# Altium PCB PCB1.PcbDoc
Units mm, origin at the board's own origin, x right, y up, seen from the top; angles counter-clockwise.
Board outline 49.02 x 49 mm, 2 copper layers (Top Layer, Bottom Layer); 50 components, 41 nets, 213 pads, 48 vias.
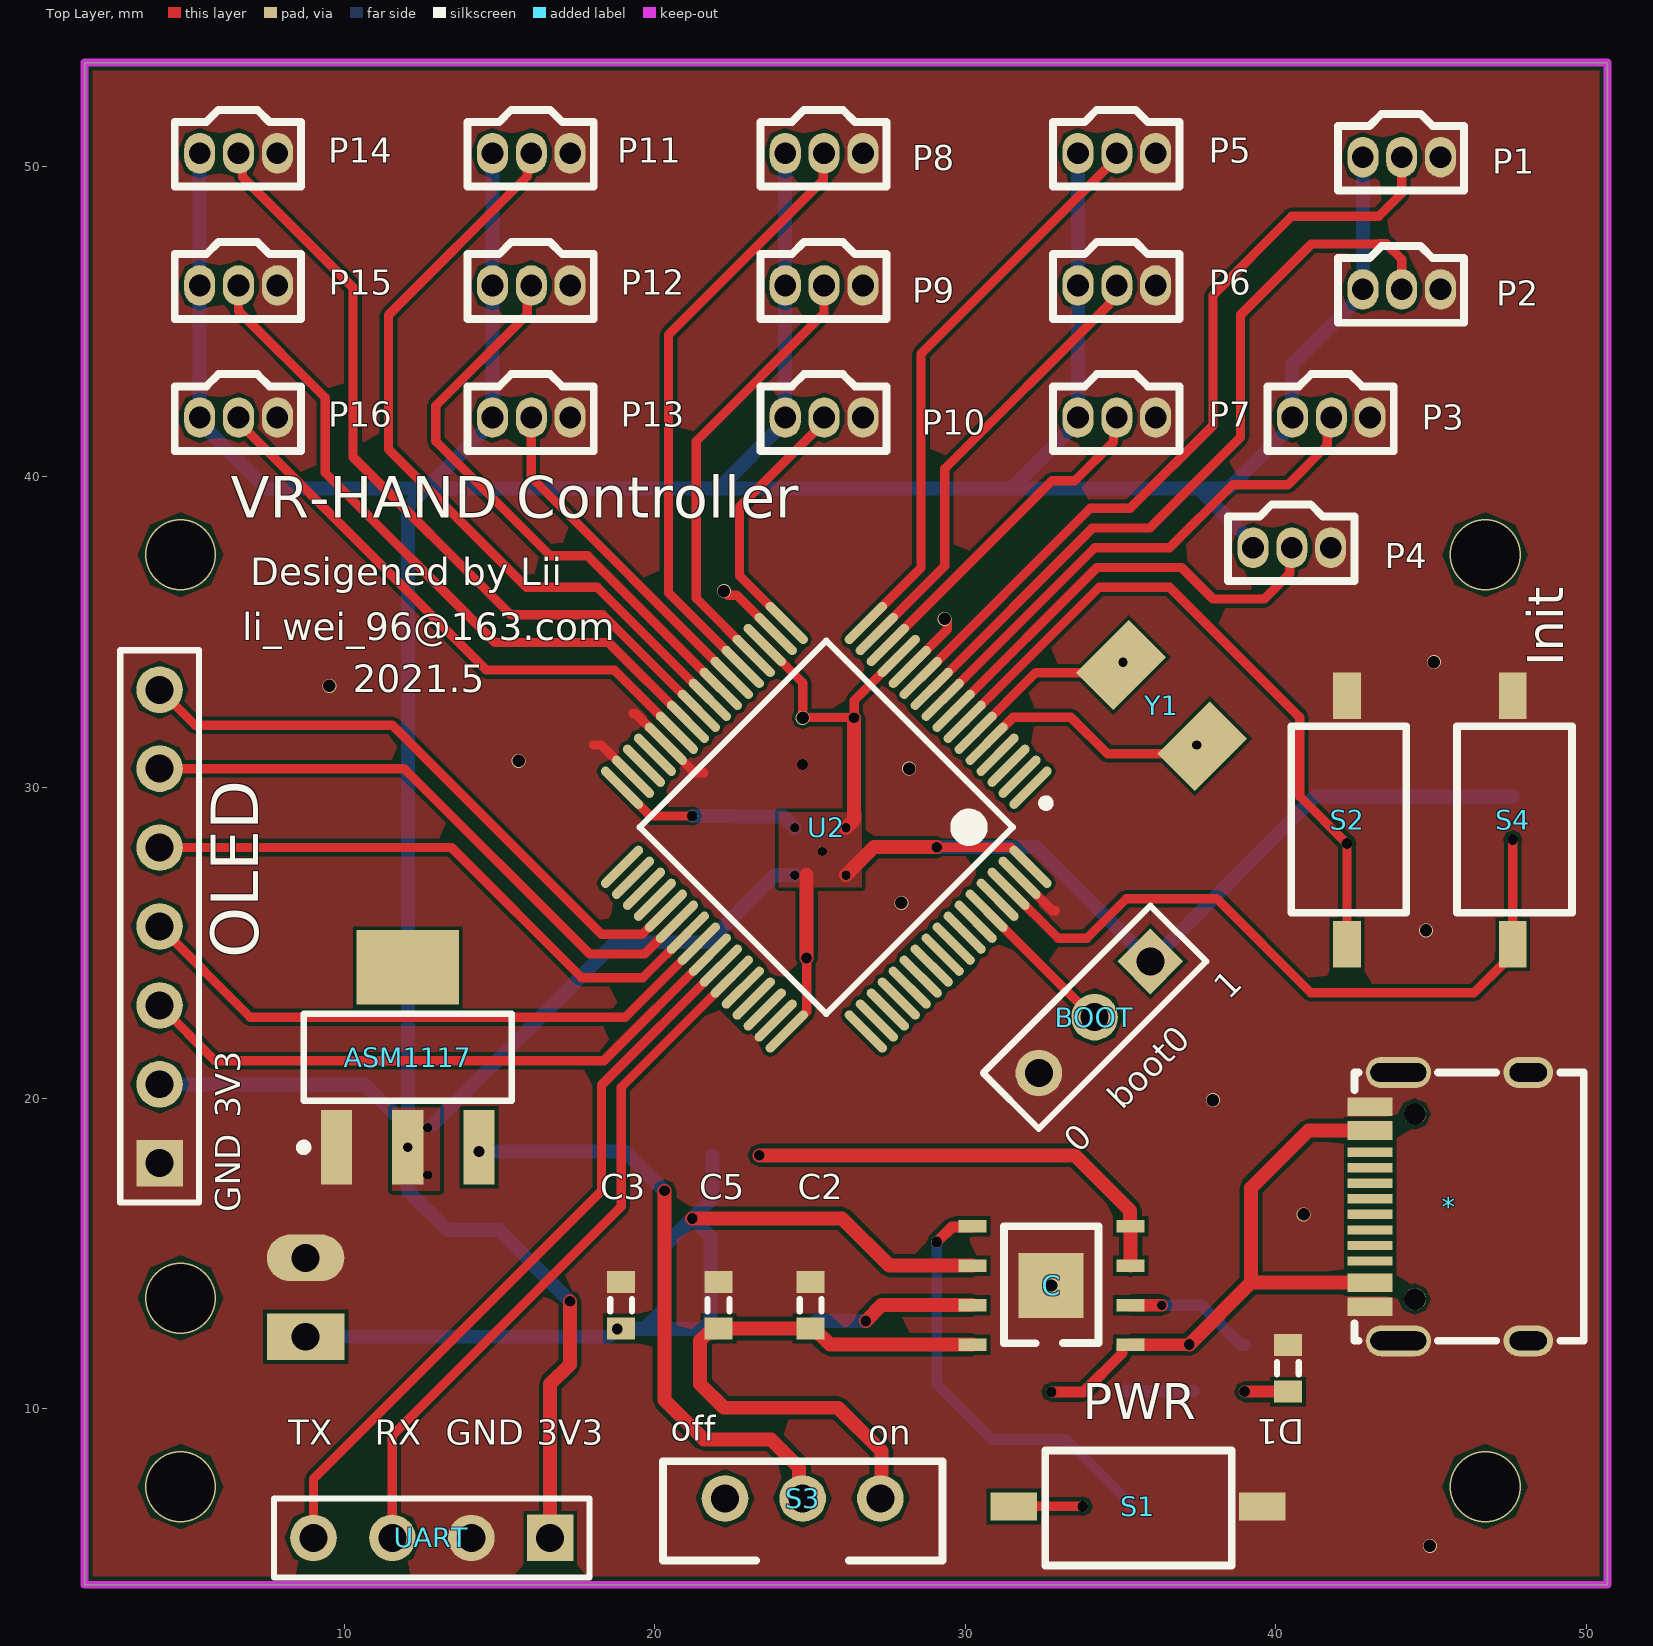
[diagram p0: Top Layer view]
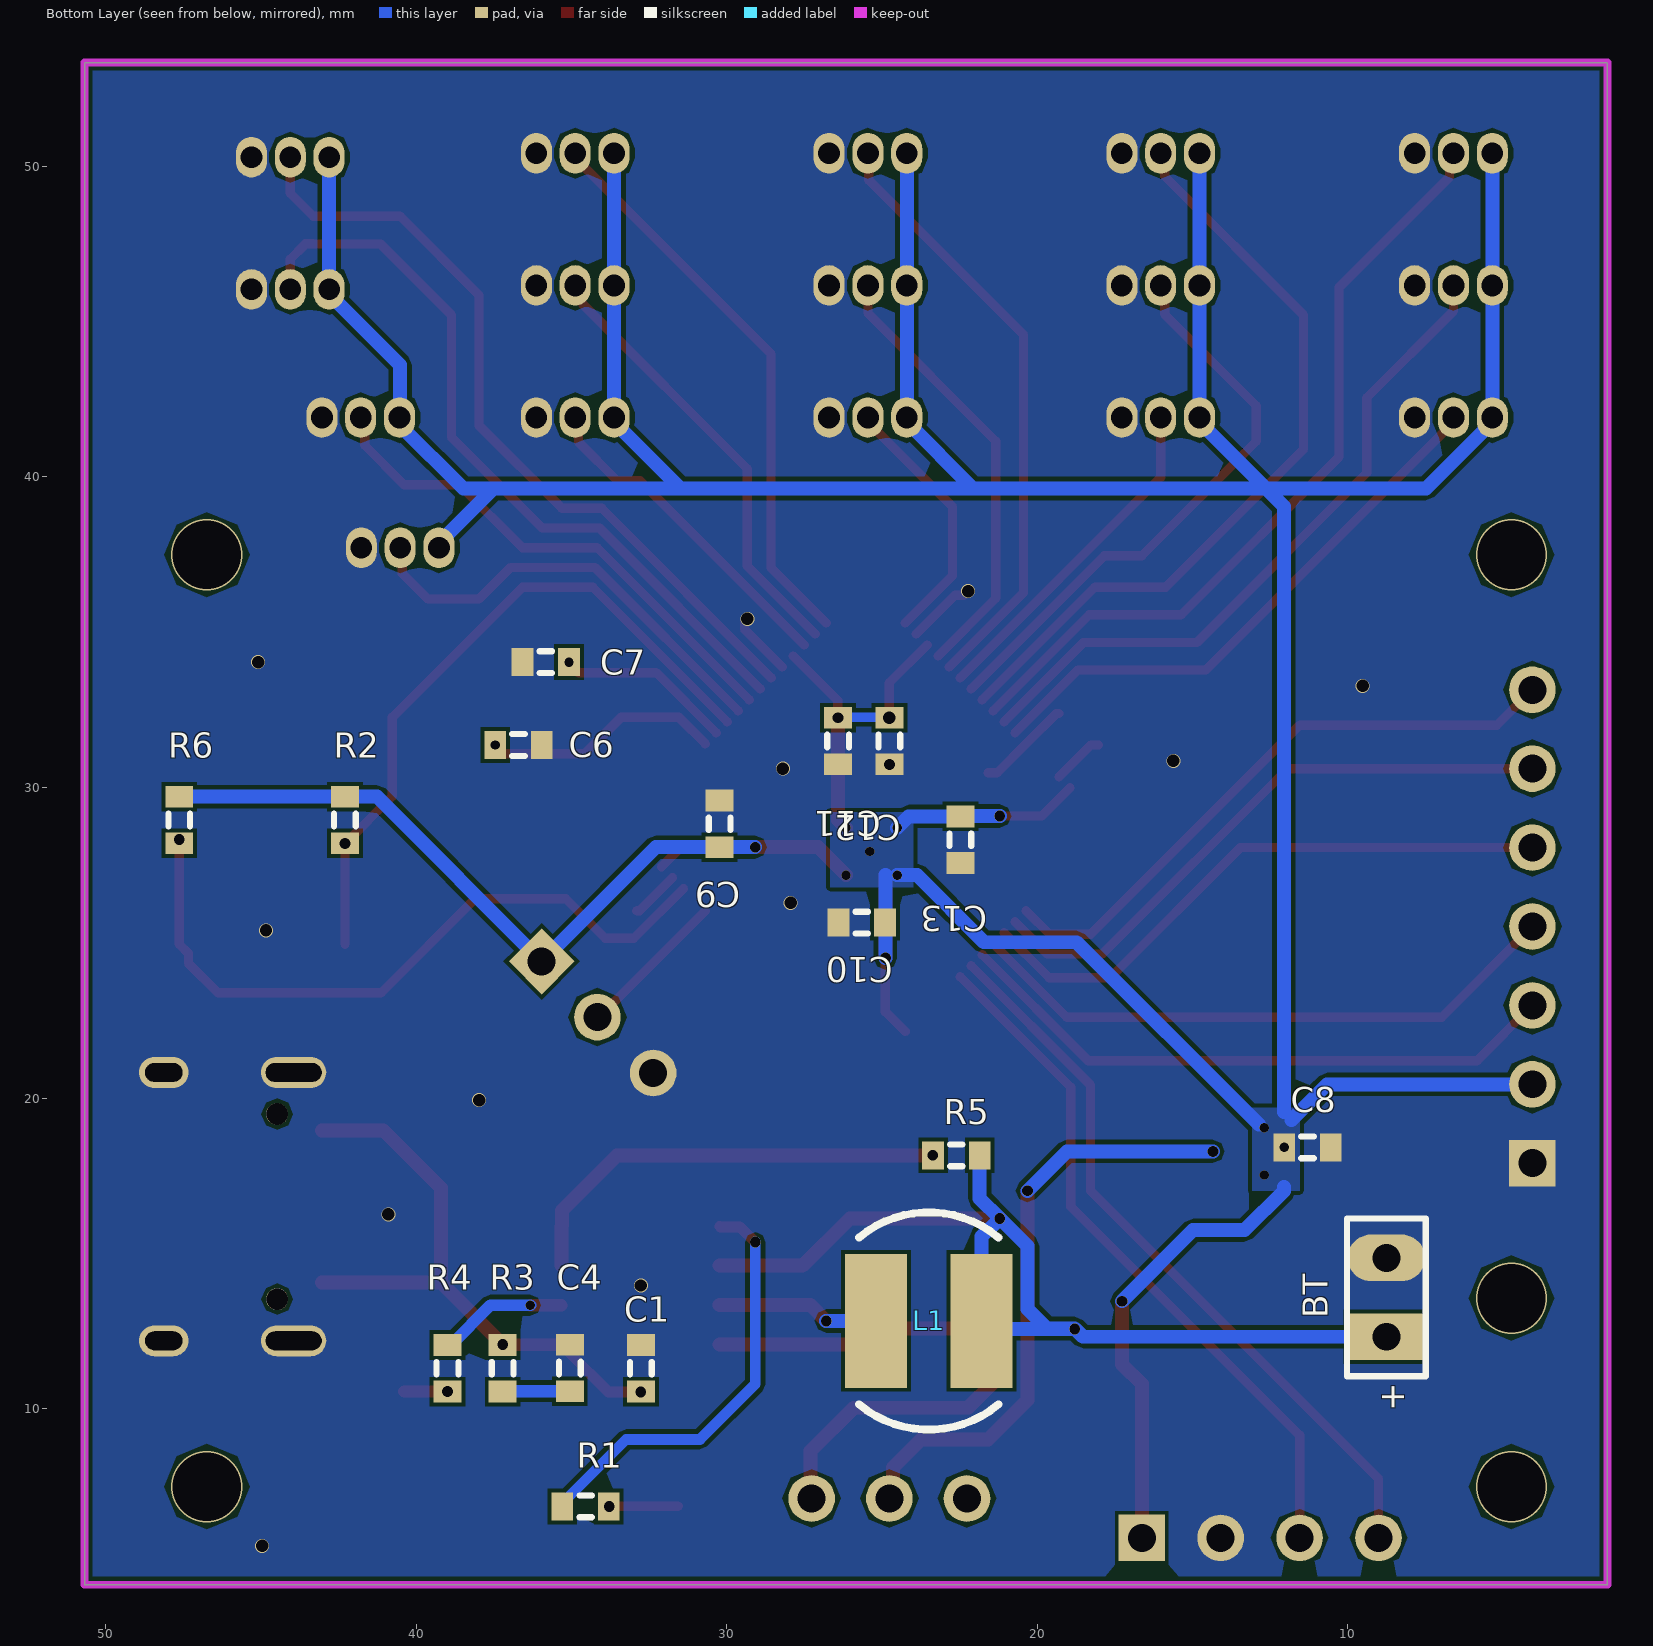
[diagram p1: Bottom Layer view, seen from below]
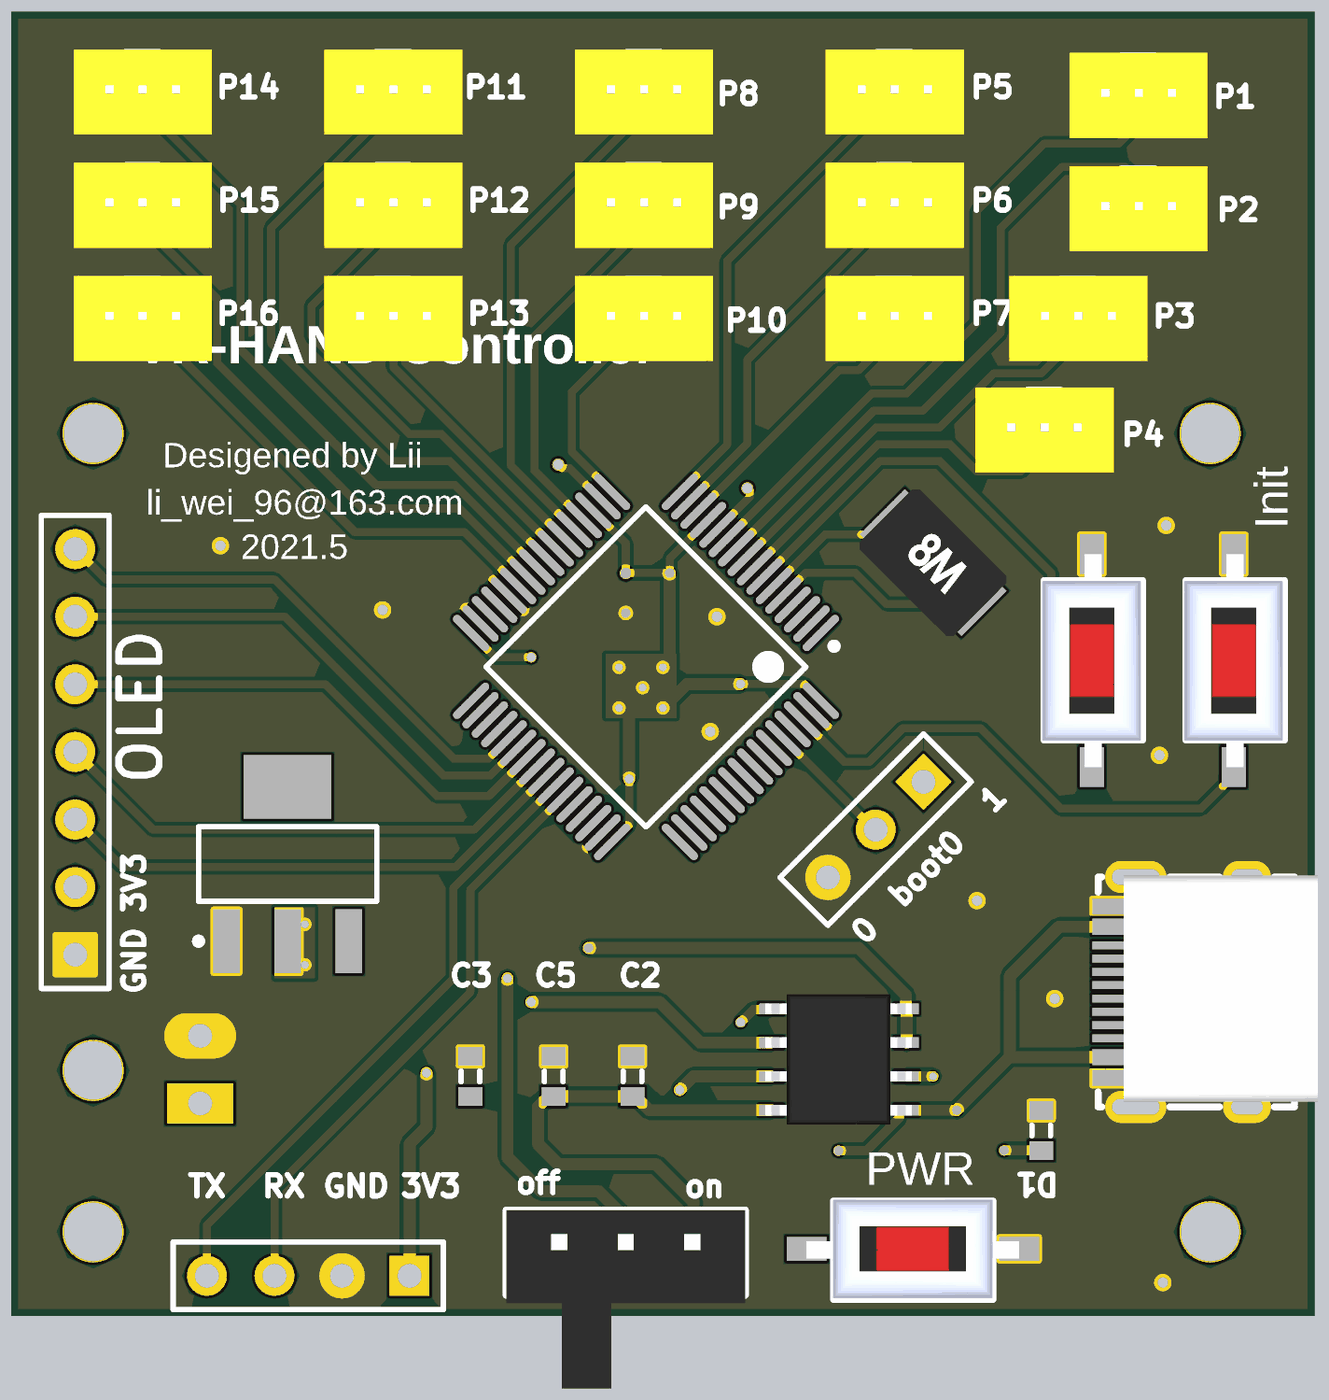
[diagram p2: 3D render of the assembled board from above, using the file's embedded part models]

## Layer stack, top to bottom
Top Solder: solder mask 0.0102, Solder Resist, Dk 3.5
Top Layer: signal copper 0.0356
Dielectric 1: dielectric 0.32, FR-4, Dk 4.8
Bottom Layer: signal copper 0.0356
Bottom Solder: solder mask 0.0102, Solder Resist, Dk 3.5

## Board outline
1.649,4.337 1.649,53.337 50.671,53.337 50.671,4.337

## Design rules (kind name [scope] priority, off if disabled: settings)
Clearance [All] p1: gap=0.12 ignorepadtopadclearanceinfootprint=TRUE
DiffPairsRouting [All] p1: maxlimit=0.6 minlimit=0.3 mostfreqgap=0.5 toplayer_minwidth=0.3 toplayer_maxwidth=0.6 toplayer_prefwidth=0.5 bottomlayer_minwidth=0.3 bottomlayer_maxwidth=0.6 bottomlayer_prefwidth=0.5 maxuncoupledlength=15
HoleSize [All] p1: absolutevalues=TRUE maxlimit=10 minlimit=0.3 maxpercent=80.000 minpercent=20.000
PlaneClearance [All] p1: clearance=0.2
PlaneConnect [All] p1: planeconnectstyle=Direct reliefexpansion=0.5 reliefentries=4 reliefconductorwidth=0.5 reliefairgap=0.15
PolygonConnect [All] p1: connectstyle=Direct reliefconductorwidth=0.5 reliefentries=4 polygonreliefangle="90 Angle" airgapwidth=0
RoomDefinition Sheet1 [InComponentClass('Sheet1')] p1: confinementstyle=ConfineOut formatcopy=TRUE lockcomponents=FALSE outline 81.396,56.437 81.396,63.611 81.257,63.881 75.3,63.881 75.3,56.388
RoutingCorners [All] p1: cornerstyle=45-Degree minsetback=0 maxsetback=5
RoutingVias [All] p1: holewidth=0.3 width=1.27 viastyle="Through Hole" minholewidth=0.3 minwidth=0.3 maxholewidth=5 maxwidth=10
SilkToSilkClearance [All] p1: silktosilkclearance=0
SilkToSolderMaskClearance [IsPad] p1: minsilkscreentomaskgap=0.1 clearancetoexposedcopper=TRUE
SolderMaskExpansion [All] p1: expansion=0.102 istentingtop=FALSE soldermaskfromhole=TRUE
Width [All] p1: maxlimit=10 minlimit=0.3 preferedwidth=0.3
23 further rules are at their usual default settings.

## Components (designator, comment, footprint, x,y, rotation, side; value= is the part's Value field where it differs from the comment)
* "USB_Type_C" USB_Type_C 46.482,16.637 r90 top
ASM1117 "ASM1117_3.3V" SOT223_N 12.051,21.315 r90 top
BOOT "Header 3" HDR1X3 35.959,24.402 r225 top
BT "Battery" BAT-2 8.763,13.589 r90 bottom
C "IP5305" SOP8_1 32.766,13.97 r180 top
C1 "Cap Pol3" J1-0603 32.766,11.303 r90 bottom value=10uf
C2 "Cap Pol3" J1-0603 25.019,13.335 r90 top value=10uf
C3 "Cap Pol3" J1-0603 18.923,13.335 r90 top value=10uf
C4 "Cap Pol3" J1-0603 35.052,11.315 r90 bottom value=10uf
C5 "Cap Pol3" J1-0603 22.056,13.335 r90 top value=22uf
C6 "Cap Pol3" J1-0603 36.703,31.369 r180 bottom value=22pF
C7 "Cap Pol3" J1-0603 35.826,34.036 r0 bottom value=22pF
C8 "Cap Pol3" J1-0603 11.303,18.415 r180 bottom value=22uF
C9 "Cap Pol3" J1-0603 30.226,28.829 r270 bottom value=10uf
C10 "Cap Pol3" J1-0603 25.654,25.654 r180 bottom value=0.1uf
C11 "Cap Pol3" J1-0603 26.416,31.496 r90 bottom value=0.1uf
C12 "Cap Pol3" J1-0603 24.765,31.496 r90 bottom value=0.1uf
C13 "Cap Pol3" J1-0603 22.479,28.321 r90 bottom value=0.1uf
D1 "LED2" J1-0603 40.386,11.303 r90 top
L1 "Inductor" CD43 23.495,12.827 r90 bottom value=2.2uH
OLED "MHDR1X7" HDR1X7 4.064,17.907 r90 top
P1 "SH1.0_3P" SH1_3P_2 44.049,50.292 r270 top
P2 "SH1.0_3P" SH1_3P_2 44.049,46.038 r270 top
P3 "SH1.0_3P" SH1_3P_2 41.783,41.91 r270 top
P4 "SH1.0_3P" SH1_3P_2 40.513,37.719 r270 top
P5 "SH1.0_3P" SH1_3P_2 34.878,50.419 r270 top
P6 "SH1.0_3P" SH1_3P_2 34.878,46.164 r270 top
P7 "SH1.0_3P" SH1_3P_2 34.878,41.91 r270 top
P8 "SH1.0_3P" SH1_3P_2 25.453,50.419 r270 top
P9 "SH1.0_3P" SH1_3P_2 25.453,46.164 r270 top
P10 "SH1.0_3P" SH1_3P_2 25.453,41.91 r270 top
P11 "SH1.0_3P" SH1_3P_2 16.029,50.419 r270 top
P12 "SH1.0_3P" SH1_3P_2 16.029,46.164 r270 top
P13 "SH1.0_3P" SH1_3P_2 16.029,41.91 r270 top
P14 "SH1.0_3P" SH1_3P_2 6.604,50.419 r270 top
P15 "SH1.0_3P" SH1_3P_2 6.604,46.164 r270 top
P16 "SH1.0_3P" SH1_3P_2 6.604,41.91 r270 top
R1 "Res3" J1-0603 34.544,6.858 r0 bottom value=10k
R2 "Res3" J1-0603 42.291,28.956 r90 bottom value=10K
R3 "Res3" J1-0603 37.211,11.303 r90 bottom value=2R
R4 "Res3" J1-0603 38.989,11.303 r270 bottom value=300R
R5 "Res3" J1-0603 22.606,18.161 r180 bottom value=1K
R6 "Res3" J1-0603 47.625,28.956 r90 bottom value=10K
S1 "SW-PB" SW_DP_1 35.56,6.858 r0 top
S2 "SW-PB" SW_DP_1 42.291,28.956 r90 top
S3 "SW-SPST" SW_s1 24.765,7.112 r0 top
S4 "SW-PB" SW_DP_1 47.625,28.956 r90 top
U2 "STM32F103RCT6" STM-LQFP64_N 25.525,28.721 r225 top
UART "Header 4" HDR1X4 16.637,5.842 r180 top
Y1 "8M" YXC_8M 36.322,32.639 r315 top

## Footprints (in the part's own frame and the unit in brackets; to place one, negate y for a bottom-side part, rotate by r counter-clockwise, add the part's x,y. Pads: shape width x height; smd on the part's side, far side on the other; paste and mask are expansions set on the pad)
BAT-2 [mm] "Battery; 2 Leads"
  rect 1.5x2.5 hole 0.9: 1(-1.27,0)
  oval 1.5x2.5 hole 0.9: 2(1.27,0)
  silkscreen extent -2.54,-1.27 2.54,1.27
CD43 [mm]
  rect 4.3x2 smd: 1(0,1.7) 2(0,-1.7)
  silkscreen extent -3.5,-2.25 3.5,2.25, body extent -2,-2.2 2,2.2, height 3.2
HDR1X3 [mm] "Connector; Header; 3 Position"
  rect 1.5x1.5 hole 0.9: 1(0,0)
  round 1.5 hole 0.9: 2(2.54,0) 3(5.08,0)
  silkscreen extent -1.27,-1.27 6.35,1.27
HDR1X4 [mm] "Connector; Header; 4 Position"
  rect 1.5x1.5 hole 0.9: 1(0,0)
  round 1.5 hole 0.9: 2(2.54,0) 3(5.08,0) 4(7.62,0)
  silkscreen extent -1.27,-1.27 8.89,1.27
HDR1X7 [mm] "Connector; Header; 7 Position"
  rect 1.5x1.5 hole 0.9: 1(0,0)
  round 1.5 hole 0.9: 2(2.54,0) 3(5.08,0) 4(7.62,0) 5(10.16,0) 6(12.7,0) 7(15.24,0)
  silkscreen extent -1.27,-1.27 16.51,1.27
J1-0603 [mm] "Chip Resistor, Body 1.6x0.8mm, IPC High Density"
  rect 0.7x0.9 smd: 1(-0.75,0) 2(0.75,0)
  silkscreen extent -0.2,-0.35 0.2,0.35, body extent -0.85,-0.48 0.85,0.48, height 0.9
SH1_3P_2 [mm]
  oval 1.3x1 hole 0.7: 1(0,1.25) 2(0,0) 3(0,-1.25)
  silkscreen extent -1.4,-2.05 1.07,2.01, body extent -1.5,-2.6 1.7,2.6, height 4.7
SOP8_1 [mm]
  rect 0.9x0.4 smd: 1(-2.56,1.905) 2(-2.56,0.635) 3(-2.56,-0.635) 4(-2.56,-1.905) 5(2.54,-1.905) 5(2.54,-1.905) 6(2.54,-0.635) 7(2.54,0.635) 8(2.54,1.905)
  rect 2.09x2.09 smd: 9(0,0)
  silkscreen extent -1.52,-1.91 1.52,1.86, body extent -2.75,-2.45 2.75,2.45, height 1.75
SOT223_N [mm] "SOT223, 4-Leads, Body 6.5x3.5mm, Pitch 2.3mm, Lead Span 7mm, IPC Medium Density"
  rect 2.4x1 smd: 1(-2.9,2.3) 2(-2.9,0) 3(-2.9,-2.3)
  rect 2.4x3.3 smd: 4(2.9,0)
  silkscreen extent -3.02,-3.35 1.4,3.47, body extent -1.85,-3.35 1.85,3.35, height 1.7
STM-LQFP64_N [mm] "Thin QFP, 64-Leads, Body 10x10mm, Pitch 0.5mm, IPC Medium Density"
  oval 1.8x0.3 smd: 1(-5.55,3.75) 2(-5.55,3.25) 3(-5.55,2.75) 4(-5.55,2.25) 5(-5.55,1.75) 6(-5.55,1.25) 7(-5.55,0.75) 8(-5.55,0.25) 9(-5.55,-0.25) 10(-5.55,-0.75) 11(-5.55,-1.25) 12(-5.55,-1.75) 13(-5.55,-2.25) 14(-5.55,-2.75) 15(-5.55,-3.25) 16(-5.55,-3.75) 33(5.55,-3.75) 34(5.55,-3.25) 35(5.55,-2.75) 36(5.55,-2.25) 37(5.55,-1.75) 38(5.55,-1.25) 39(5.55,-0.75) 40(5.55,-0.25) 41(5.55,0.25) 42(5.55,0.75) 43(5.55,1.25) 44(5.55,1.75) 45(5.55,2.25) 46(5.55,2.75) 47(5.55,3.25) 48(5.55,3.75)
  oval 0.3x1.8 smd: 17(-3.75,-5.55) 18(-3.25,-5.55) 19(-2.75,-5.55) 20(-2.25,-5.55) 21(-1.75,-5.55) 22(-1.25,-5.55) 23(-0.75,-5.55) 24(-0.25,-5.55) 25(0.25,-5.55) 26(0.75,-5.55) 27(1.25,-5.55) 28(1.75,-5.55) 29(2.25,-5.55) 30(2.75,-5.55) 31(3.25,-5.55) 32(3.75,-5.55) 49(3.75,5.55) 50(3.25,5.55) 51(2.75,5.55) 52(2.25,5.55) 53(1.75,5.55) 54(1.25,5.55) 55(0.75,5.55) 56(0.25,5.55) 57(-0.25,5.55) 58(-0.75,5.55) 59(-1.25,5.55) 60(-1.75,5.55) 61(-2.25,5.55) 62(-2.75,5.55) 63(-3.25,5.55) 64(-3.75,5.55)
  silkscreen extent -5.67,-4.25 4.25,4.57, body extent -5,-5 5,5, height 1.6
SW_DP_1 [mm]
  rect 1.5x0.9 smd: 1(-4,0) 2(4,0)
  silkscreen extent -2.98,-1.91 3.02,1.8, body extent -4,-1.85 4,1.85, height 2.5
SW_s1 [mm]
  round 1.5 hole 0.9: 1(2.5,0) 2(0,0) 3(-2.5,0)
  silkscreen extent -4.5,-2 4.5,1.2, body extent -4.5,-5.5 4.5,1.2, height 4.55
USB_Type_C [mm]
  rect 0.6x1.45 smd: 1(-3.354,3.455) 2(-2.579,3.455) 11(2.321,3.455) 12(3.091,3.455)
  rect 0.3x1.45 smd: 3(-1.379,3.454) 4(-0.379,3.455) 5(0.121,3.455) 6(1.121,3.455) 7(-1.879,3.455) 8(-0.879,3.455) 9(0.621,3.455) 10(1.621,3.455)
  oval 1x2.1 hole 0.6 slot 1.8 at 90 deg: 13(-4.449,2.54) 14(4.191,2.54)
  oval 1x1.6 hole 0.6 slot 1.2 at 90 deg: 15(-4.449,-1.64) 16(4.191,-1.64)
  round 0.7 hole 0.7 unplated: ""(-3.109,2.01) ""(2.851,2.01)
  silkscreen extent -4.45,-3.43 4.19,3.96, body extent -4.25,-5.46 4.83,3, height 22.6
YXC_8M [mm]
  rect 1.7x2.4 smd: 1(-1.85,0) 2(1.85,0)
  body extent -2.5,-1.6 2.5,1.6, height 1.2

## Part data
BOOT: "Header, 3-Pin", LatestRevisionDate=17-Jul-2002, LatestRevisionNote="Re-released for DXP Platform.", Publisher="Altium Limited"
BT: "Multicell Battery", LatestRevisionDate=17-Jul-2002, LatestRevisionNote="Re-released for DXP Platform.", PackageDescription="Battery; 2 Leads", PackageReference=BAT-2, Published=24-Mar-1999, Publisher="Altium Limited"
C1 C2 C3 C4 C5 C6 C7 C8 C9 C10 C11 C12 C13: "Polarized Capacitor (Surface Mount)", LatestRevisionDate=29-May-2009, LatestRevisionNote="IPC-7351 Footprint Added.", PackageDescription="Chip Capacitor", PackageReference=C0805, Published=8-Jun-2000, Publisher="Altium Limited"
D1: "Typical RED, GREEN, YELLOW, AMBER GaAs LED", LatestRevisionDate=17-Jul-2002, LatestRevisionNote="Re-released for DXP Platform.", PackageDescription="SM LED; 2 Flat Leads", PackageReference=3.2X1.6X1.1, PackageVersion=Feb-2002, Published=8-Jun-2000, Publisher="Altium Limited"
OLED: "Header, 7-Pin", LatestRevisionDate=17-Jul-2002, LatestRevisionNote="Re-released for DXP Platform.", Publisher="Altium Limited"
R1 R2 R3 R4 R5 R6: "Resistor", LatestRevisionDate=29-May-2009, LatestRevisionNote="IPC-7351 Footprint Added.", PackageDescription="Chip Resistor", PackageReference=J1-0603, Published=8-Jun-2000, Publisher="Altium Limited"
S1 S2 S4: "Switch", LatestRevisionDate=17-Jul-2002, LatestRevisionNote="Re-released for DXP Platform.", PackageDescription="Switch; 2 Leads", PackageReference=SPST-2, Published=24-Mar-1999, Publisher="Altium Limited"
S3: "Single-Pole, Single-Throw Switch", LatestRevisionDate=17-Jul-2002, LatestRevisionNote="Re-released for DXP Platform.", PackageDescription="Switch; 2 Leads", PackageReference=SPST-2, Published=24-Mar-1999, Publisher="Altium Limited"
U2: "ARM Cortex-M3 32-bit MCU, 256 KB Flash, 48 KB Internal RAM, 51 I/Os, 64-pin LQFP, -40 to 85 degC, Tray", I/Os (High Current)=51, Operating Frequency(F) (Processor speed) (MHz)=72, Supplier Part Number 1=497-9033-ND, Supply Voltage(Vcc) min (V)=2, A/D Converter="3x12-bit (16 Channel)", ComponentLink1Description="Manufacturer URL", ComponentLink1URL=http://www.st.com/web/en/home.html, ComponentLink2Description=Datasheet, ComponentLink2URL=http://www.st.com/st-web-ui/static/active/en/resource/technical/document/datasheet/CD00191185.pdf, ComponentLink3Description="Package Specification", ComponentLink3URL=http://www.st.com/st-web-ui/static/active/en/resource/technical/document/datasheet/DM00037051.pdf, Core="ARM Cortex-M3", D/A Converter="2x12-bit (2 Channel)", DatasheetVersion="Rev. 8", FLASH Size (Prog) (kB)=256, Internal RAM Size (kB)=48, Mounting Technology="Surface Mount", PackageDescription="64-Pin Low Profile Quad Flat Package, 10 x 10 mm Body, 0.5 mm Pitch", PackageReference=LQFP64, PackageVersion="Rev. 4, 06/2013", Packing=Tray, PartNumber=STM32F103RCT6, Supplier 1=Digi-Key, Supplier 2=Newark, Supplier 3=Newark, Supplier 4=Mouser, Supplier Part Number 2=01P4099, Supplier Part Number 3=57P1227, Supplier Part Number 4=511-STM32F103RCT6
UART: "Header, 4-Pin", LatestRevisionDate=17-Jul-2002, LatestRevisionNote="Re-released for DXP Platform.", Publisher="Altium Limited"
Y1: library part XTAL, "Crystal Oscillator", LatestRevisionDate=17-Jul-2002, LatestRevisionNote="Re-released for DXP Platform.", PackageDescription="Crystal, Thru-Hole; 2 Leads; Body 3.1 x 8.2 mm (Dia.xH)", PackageReference=R38, Published=8-Jun-2000, Publisher="Altium Limited"
L1: Code_IEC=1005, Code_JEITA=0402, LatestRevisionDate=29-May-2009, LatestRevisionNote="IPC-7351 Footprint Added.", PackageDescription="Chip Inductor", PackageReference=0402-A, Published=8-Jun-2000, Publisher="Altium Limited"

## Via types
v1: diameter 0.35, hole 0.35, Top Layer to Bottom Layer, 19 vias
v2: diameter 0.45, hole 0.4, Top Layer to Bottom Layer, 13 vias
v3: diameter 0.3, hole 0.3, Top Layer to Bottom Layer, 11 vias
v4: diameter 2.3, hole 2.2, Top Layer to Bottom Layer, 5 vias

## Nets (pads, with @x,y where several pads share a name; then routed paths per layer and width w, separated by ;. In a path a pad name is that pad's centre, name@x,y a point inside that pad or via, vN(x,y) a via of type N, cw(c..) or ccw(c..) an arc to the next point about the centre after c; other vN are vias at no path point)
3.7V: ASM1117.3 S3.2 | length 19.5
  Top Layer w0.45: v1(20.32,17.018) 20.32,10.287 21.59,9.017 23.749,9.017 24.652,8.114 24.652,7.225 S3.2
  Bottom Layer w0.45: v1(14.351,18.288) 19.05,18.288 v1(20.32,17.018)
3V3: ASM1117.2 BOOT.1 C8.1 C9.2 C10.2 C11.2 C12.2 C13.2 OLED.2 P1.3 P2.3 P3.3 P4.3 P5.3 P6.3 P7.3 P8.3 P9.3 P10.3 P11.3 P12.3 P13.3 P14.3 P15.3 P16.3 R2.2 R6.2 U2.13 U2.19 U2.32 U2.48 U2.64 UART.1 | length 206.3
  Top Layer w0.3: U2.32 19.86,29.083 v1(21.209,29.083) ; U2.19 24.765,33.37 24.765,32.258 24.771,32.252 26.41,32.252 v1(26.416,32.246) 26.426,32.256 26.426,32.803 U2.13 ; U2.48 24.892,22.785 v1(24.892,24.511) ; v1(29.083,28.079) 31.47,28.079 U2.64
  Top Layer w0.45: UART.1 16.637,10.795 17.272,11.43 v1(17.272,13.462) ; v1(24.892,24.511) 24.892,27.178 ; v3(26.162,27.178) 27.063,28.079 v1(29.083,28.079) ; v3(26.162,28.702) 26.416,28.956 v1(26.416,32.246)
  Bottom Layer w0.3: C12.2@24.765,32.258 C11.2@26.404,32.258 ; C11.2@26.404,32.131 C11.2@26.416,32.119
  Bottom Layer w0.45: OLED.2 10.668,20.447 11.811,19.304 ; P14.3 P15.3 P16.3 5.354,41.76 7.49,39.624 12.643,39.624 ; 12.065,17.145 12.065,17.018 13.335,15.748 14.986,15.748 v1(17.272,13.462) ; 12.065,19.558 12.065,39.046 12.643,39.624 ; 12.859,19.145 18.732,25.019 21.717,25.019 23.876,27.178 v3(24.511,27.178) ; P11.3 P12.3 P13.3 14.779,41.76 12.643,39.624 ; v1(21.209,29.083) 22.467,29.083 C13.2 24.142,29.071 v3(24.511,28.702) ; P8.3 P9.3 P10.3 24.203,41.76 22.067,39.624 ; v1(24.892,24.511) 24.892,27.178 ; v1(29.083,28.079) 32.282,28.079 BOOT.1 41.263,29.706 R2.2 R6.2 ; P5.3 P6.3 P7.3 33.628,41.76 31.492,39.624 ; P4.3 39.263,37.869 37.508,39.624 ; P1.3 P2.3 42.799,45.888 40.513,43.602 40.513,41.93 P3.3 40.533,41.676 38.481,39.624 37.508,39.624 ; 12.643,39.624 22.067,39.624 ; 22.067,39.624 31.492,39.624 ; 31.492,39.624 37.508,39.624
  other v2: 24.765,32.246
  other v3: 12.7,17.526 12.051,18.415 12.7,19.05 25.4,27.94
5V: *.2 *.11 C1.1 C.1 R3.2 | length 19.5
  Top Layer w0.35: v1(32.766,10.541) 33.802,10.541 35.051,11.79 35.051,12.04 35.076,12.065 C.1
  Top Layer w0.4: C.1 v1(37.211,12.065)
  Top Layer w0.45: v1(37.211,12.065) 39.204,14.058 ; *.2 39.204,14.058 ; *.11 41.056,18.958 39.204,17.106 39.204,14.058
BAT: BT.1 C3.1 C.6 L1.2 R5.2 | length 33.8
  Top Layer w0.45: v1(21.209,16.129) 26.035,16.129 27.559,14.605 C.6
  Bottom Layer w0.45: BT.1 18.53,12.319 18.796,12.585 19.697,12.585 20.32,13.208 20.32,15.24 v1(21.209,16.129) ; v1(18.796,12.573) 19.697,12.573 21.541,12.573 L1.2 21.795,15.543 v1(21.209,16.129) ; R5.2 21.856,16.776 v1(21.209,16.129)
BLK: OLED.7 U2.37 | length 19.9
  Top Layer w0.3: OLED.7 5.207,32.004 11.557,32.004 18.288,25.273 19.602,25.273 U2.37
BOOT0: BOOT.2 U2.60 | length 4.9
  Top Layer w0.3: U2.60 BOOT.2@34.139,22.582
DC: OLED.6 U2.38 | length 19.6
  Top Layer w0.3: OLED.6 11.938,30.607 17.907,24.638 19.674,24.638 U2.38
E_init: R6.1 S4.1 U2.62 | length 22.9
  Top Layer w0.3: U2.62 32.989,25.146 33.909,25.146 35.179,26.416 38.1,26.416 41.125,23.391 46.378,23.391 47.325,24.338 47.325,24.656 S4.1 v1(47.625,28.321)
GND: *.1 *.12 *.13 *.14 *.15 *.16 ASM1117.1 BOOT.3 BT.2 C1.2 C2.2 C3.2 C4.2 C5.2 C6.2 C7.2 C8.2 C9.1 C10.1 C11.1 C12.1 C13.1 C.9 D1.2 OLED.1 P1.1 P2.1 P3.1 P4.1 P5.1 P6.1 P7.1 P8.1 P9.1 P10.1 P11.1 P12.1 P13.1 P14.1 P15.1 P16.1 S1.2 S2.2 S4.2 U2.12 U2.18 U2.28 U2.31 U2.47 U2.63 UART.2 | length 10.7
  Top Layer w0.3: 18.034,31.369 18.281,31.369 U2.31 ; 19.304,32.385 19.386,32.385 U2.28 21.291,30.48 21.59,30.48 ; v2(22.225,36.322) 22.352,36.195 22.647,36.195 U2.18 ; U2.12 29.425,35.096 29.425,35.345 v2(29.337,35.433) ; U2.63 32.807,26.035 32.893,26.035
  other v1: 24.765,30.746
  other v2: 44.958,5.588 32.766,13.97 40.894,16.256 37.973,19.939 44.831,25.4 27.94,26.289 28.194,30.607 15.621,30.861 9.525,33.274 45.085,34.036
IN1: P4.2 U2.8 | length 14.3
  Top Layer w0.3: U2.8 34.242,37.084 36.957,37.084 37.973,36.068 39.624,36.068 40.447,36.891 40.447,37.653 P4.2
IN2: P3.2 U2.9 | length 16.7
  Top Layer w0.3: U2.9 34.17,37.719 36.576,37.719 38.608,39.751 40.386,39.751 41.656,41.021 41.656,41.783 P3.2
IN3: P2.2 U2.10 | length 24.5
  Top Layer w0.3: U2.10 34.097,38.354 35.941,38.354 38.862,41.275 38.862,45.212 41.148,47.498 43.307,47.498 43.31,47.501 43.558,47.501 44.049,47.01 P2.2
IN4: P1.2 U2.11 | length 25.6
  Top Layer w0.3: U2.11 34.025,38.989 35.306,38.989 37.973,41.656 37.973,45.847 40.513,48.387 43.307,48.387 44.049,49.129 P1.2
IN5: P7.2 U2.14 | length 10.8
  Top Layer w0.3: U2.14 32.793,39.878 33.528,39.878 34.772,41.122 34.772,41.804 P7.2
IN6: P6.2 U2.15 | length 14.4
  Top Layer w0.3: U2.15 29.337,37.129 29.337,40.259 34.614,45.536 34.614,45.56 34.878,45.825 P6.2
IN7: P5.2 U2.16 | length 18.5
  Top Layer w0.3: U2.16 28.575,37.074 28.575,43.966 34.878,50.269 P5.2
IN8: P10.2 U2.17 | length 8.4
  Top Layer w0.3: U2.17 22.733,36.816 22.733,39.04 25.453,41.76 P10.2
IN9: P9.2 U2.20 | length 14.4
  Top Layer w0.3: U2.20 21.336,36.092 21.336,41.148 25.453,45.265 P9.2
IN10: P8.2 U2.21 | length 19.6
  Top Layer w0.3: U2.21 20.447,36.274 20.447,44.577 25.424,49.554 25.424,50.39 P8.2
IN11: P13.2 U2.22 | length 11.1
  Top Layer w0.3: P13.2 16.029,39.985 U2.22
IN12: P12.2 U2.23 | length 18.8
  Top Layer w0.3: P12.2 15.895,46.031 15.895,45.232 12.954,42.291 12.954,41.148 16.637,37.465 17.842,37.465 U2.23
IN13: P11.2 U2.24 | length 25.1
  Top Layer w0.3: P11.2 15.895,50.285 15.895,49.677 11.43,45.212 11.43,40.894 15.875,36.449 18.15,36.449 U2.24
IN14: P14.2 U2.25 | length 25.8
  Top Layer w0.3: P14.2 6.733,50.29 6.733,49.655 10.287,46.101 10.287,40.64 15.367,35.56 18.332,35.56 U2.25
IN15: P15.2 U2.26 | length 22.2
  Top Layer w0.3: P15.2 6.604,45.339 9.398,42.545 9.398,40.132 14.859,34.671 18.514,34.671 U2.26
IN16: P16.2 U2.27 | length 18.4
  Top Layer w0.3: P16.2 6.604,41.76 14.582,33.782 18.696,33.782 U2.27
NetC2_1: C2.1 C5.1 C.8 S3.1 | length 18.8
  Top Layer w0.35: C2.1 C2.1@25.119,12.585
  Top Layer w0.45: C2.1 C5.1 21.931,12.46 21.727,12.46 21.463,12.196 21.463,10.795 22.225,10.033 25.908,10.033 27.305,8.636 27.305,7.152 S3.1 ; C2.1@25.119,12.585 25.639,12.065 C.8
NetC4_1: C4.1 R3.1 | length 2.3
  Bottom Layer w0.4: C4.1 R3.1@37.338,10.565
NetC_2: C.2 R4.1 | length 4.2
  Top Layer w0.4: C.2 v3(36.322,13.335)
  Bottom Layer w0.381: v3(36.322,13.335) 37.607,13.335 38.889,12.053 R4.1
NetC_3: C.3 C.4 R5.1 | length 14.5
  Top Layer w0.45: v1(23.368,18.161) 33.528,18.161 35.301,16.388 35.301,15.9 C.4 C.3
NetC_5: C.5 R1.2 | length 13.8
  Top Layer w0.35: v1(29.083,15.366) 29.567,15.85 30.201,15.85 C.5@30.226,15.875
  Bottom Layer w0.35: v1(29.083,15.366) 29.083,10.795 30.861,9.017 33.235,9.017 35.294,6.958 R1.2
NetC_7: C.7 L1.1 | length 5.2
  Top Layer w0.45: v1(26.797,12.827) 27.305,13.335 C.7
  Bottom Layer w0.45: L1.1 v1(26.797,12.827)
NetD1_1: D1.1 R4.2 | length 1.4
  Top Layer w0.381: v1(38.989,10.553) D1.1
NetR1_1: R1.1 S1.1 | length 2.2
  Top Layer w0.3: S1.1 v1(33.782,6.858)
NRST: R2.1 S2.1 U2.7 | length 22.3
  Top Layer w0.3: U2.7 34.314,36.449 36.576,36.449 40.767,32.258 40.767,29.718 v1(42.291,28.194) S2.1
OSC_IN: C6.1 U2.5 Y1.2 | length 7.9
  Top Layer w0.3: U2.5 31.537,32.258 33.401,32.258 34.576,31.083 37.383,31.083 Y1.2
  other v3: 37.453,31.369
OSC_OUT: C7.1 U2.6 Y1.1 | length 5.6
  Top Layer w0.3: U2.6 32.272,33.7 34.766,33.7 Y1.1
  other v3: 35.076,34.036
RES: OLED.5 U2.39 | length 19.3
  Top Layer w0.3: OLED.5 13.462,28.067 17.653,23.876 19.619,23.876 U2.39
SCL: OLED.3 U2.41 | length 19.9
  Top Layer w0.3: OLED.3 5.842,21.209 18.367,21.209 U2.41
SDA: OLED.4 U2.40 | length 19.6
  Top Layer w0.3: OLED.4 6.985,22.606 19.057,22.606 U2.40
UART_RX: U2.43 UART.3 | length 22.6
  Top Layer w0.3: UART.3 11.557,9.144 18.923,16.51 18.923,20.351 U2.43
UART_TX: U2.42 UART.4 | length 23.9
  Top Layer w0.3: UART.4 9.017,7.747 18.288,17.018 18.288,20.423 U2.42
pads on no net: *. *.3 *.4 *.5 *.6 *.7 *.8 *.9 *.10 ASM1117.4 S3.3 U2.1 U2.2 U2.3 U2.4 U2.29 U2.30 U2.33 U2.34 U2.35 U2.36 U2.44 U2.45 U2.46 U2.49 U2.50 U2.51 U2.52 U2.53 U2.54 U2.55 U2.56 U2.57 U2.58 U2.59 U2.61
copper on no net:
  other v4: 4.736,7.493 46.736,7.493 4.736,13.561 4.736,37.493 46.736,37.493

## Polygon pours and split planes (outlines as drawn)
GND on Top Layer "GND_L01_P043" (solid, remove dead copper, pour order 43): 1.649,53.337 50.671,53.337 50.671,4.337 1.649,4.337
3V3 on Top Layer "3V3_L01_P005" (solid, pour order 5): 24.003,29.21 26.67,29.21 26.67,26.797 24.003,26.797
3V3 on Top Layer "3V3_L01_P023" (solid, pour order 23): 11.557,19.685 13.081,19.685 13.081,17.018 11.557,17.018
no net on Top Layer "NONET_L01_P016" (solid, pour order 16): 1.905,53.721
GND on Bottom Layer "GND_L02_P039" (solid, remove dead copper, pour order 39): 1.649,53.337 1.649,4.337 50.671,4.337 50.671,53.337
3V3 on Bottom Layer "3V3_L02_P003" (solid, pour order 3): 24.003,29.21 26.67,29.21 26.67,26.797 24.003,26.797
3V3 on Bottom Layer "3V3_L02_P022" (solid, pour order 22): 11.557,19.685 13.081,19.685 13.081,17.018 11.557,17.018
3V3 on Bottom Layer "3V3_L02_P020" (solid, pour order 20): 13.716,20.066

## Keep-outs
Keep-Out Layer:
  lines w0.25: 1.649,53.337 1.649,4.337 50.649,4.337 ; 1.671,53.337 50.671,53.337 50.671,4.337

## Silkscreen, mask and mechanical layers (free items; w line width, h text height)
Top Overlay:
  text "VR-HAND Controller" at 6.35,38.227 h2.3
  text "Desigened by Lii" at 6.985,36.223 h1.5
  text "li_wei_96@163.com" at 6.731,34.446 h1.5
  text "Init" at 49.644,33.909 h2 r90
  text "2021.5" at 10.286,32.783 h1.5
  text "1" at 38.481,23.143 h0.8 r45
  text "boot0" at 35.052,19.587 h0.8 r45
  text "3V3" at 6.658,19.377 h0.8 r90
  text "0" at 33.655,18.19 h0.8 r45
  text "GND" at 6.658,16.329 h0.8 r90
  text "PWR" at 33.782,9.271 h2
  text "off" at 20.52,8.963 h0.8
  text "TX" at 8.201,8.836 h0.8
  text "RX" at 10.995,8.836 h0.8
  text "GND" at 13.281,8.836 h0.8
  text "3V3" at 16.202,8.836 h0.8
  text "on" at 26.87,8.836 h0.8
Mechanical 1:
  lines w0.35: 1.671,4.337 1.671,4.359 1.671,53.337 50.671,53.337 50.671,4.359 50.649,4.337 1.671,4.337

## Text inside footprints (layer, text, board x,y; h text height)
BT: Bottom Overlay "+" at 8.186,9.919 h0.8 r270